# EAGLE board RasPi-BplusHAT_CamSlot (EAGLE 7.4.0)
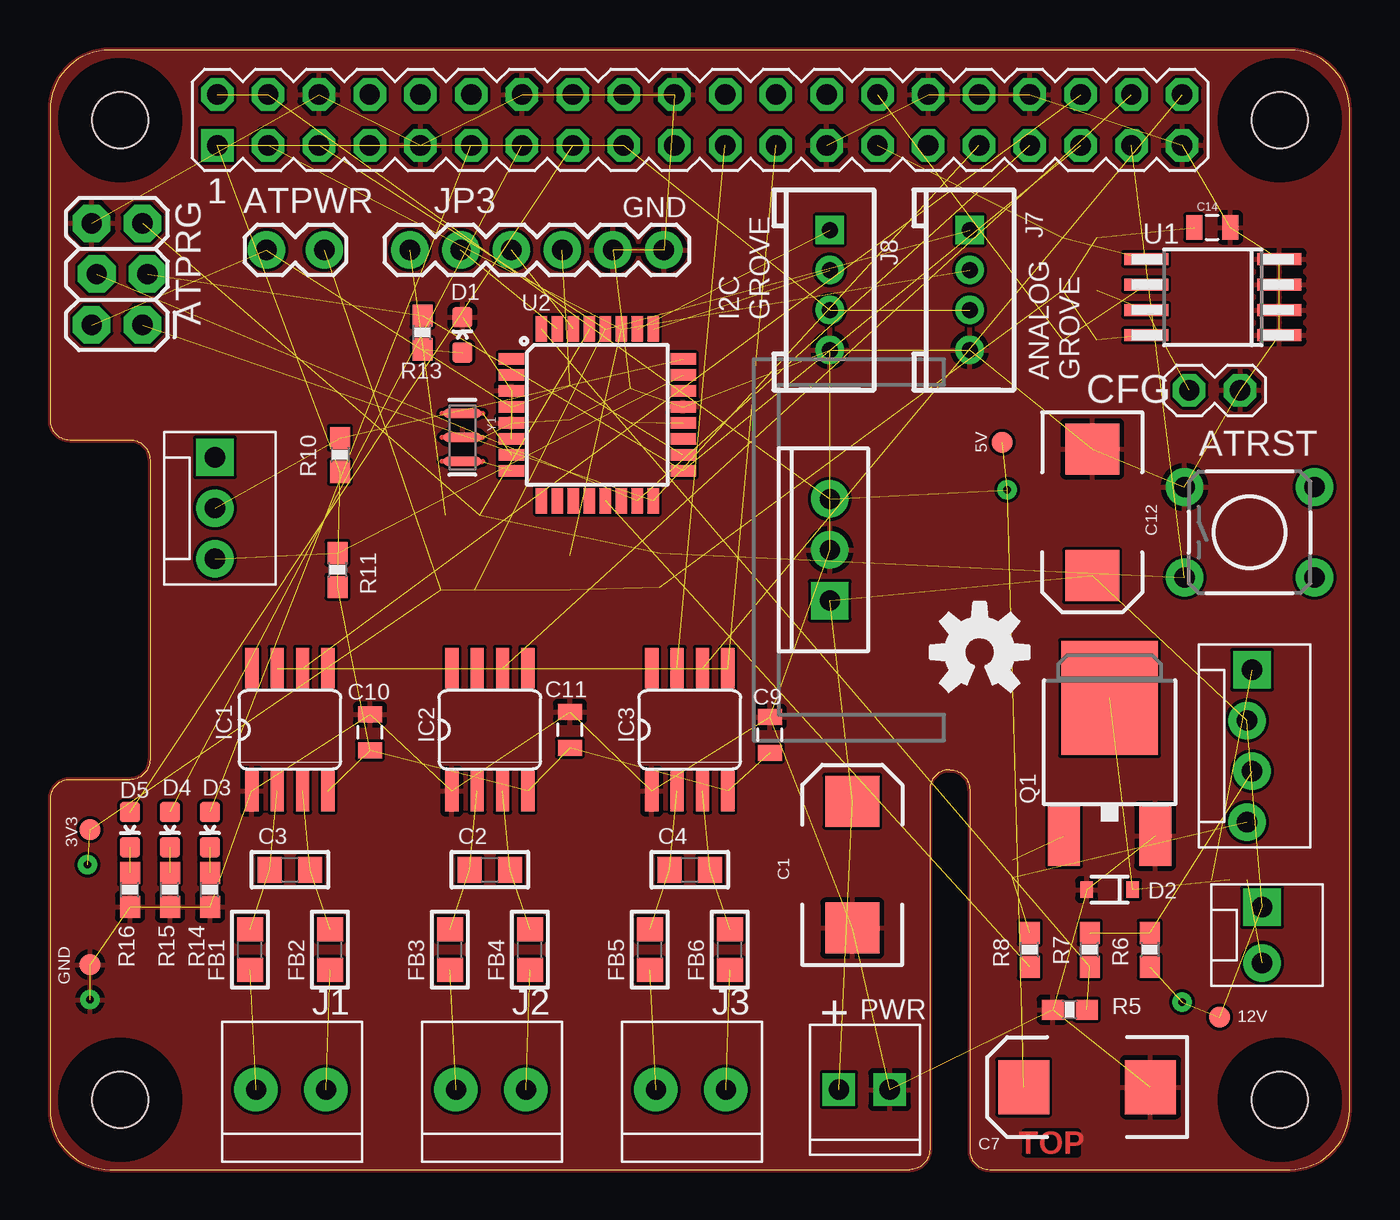
[diagram p0: board, top side]
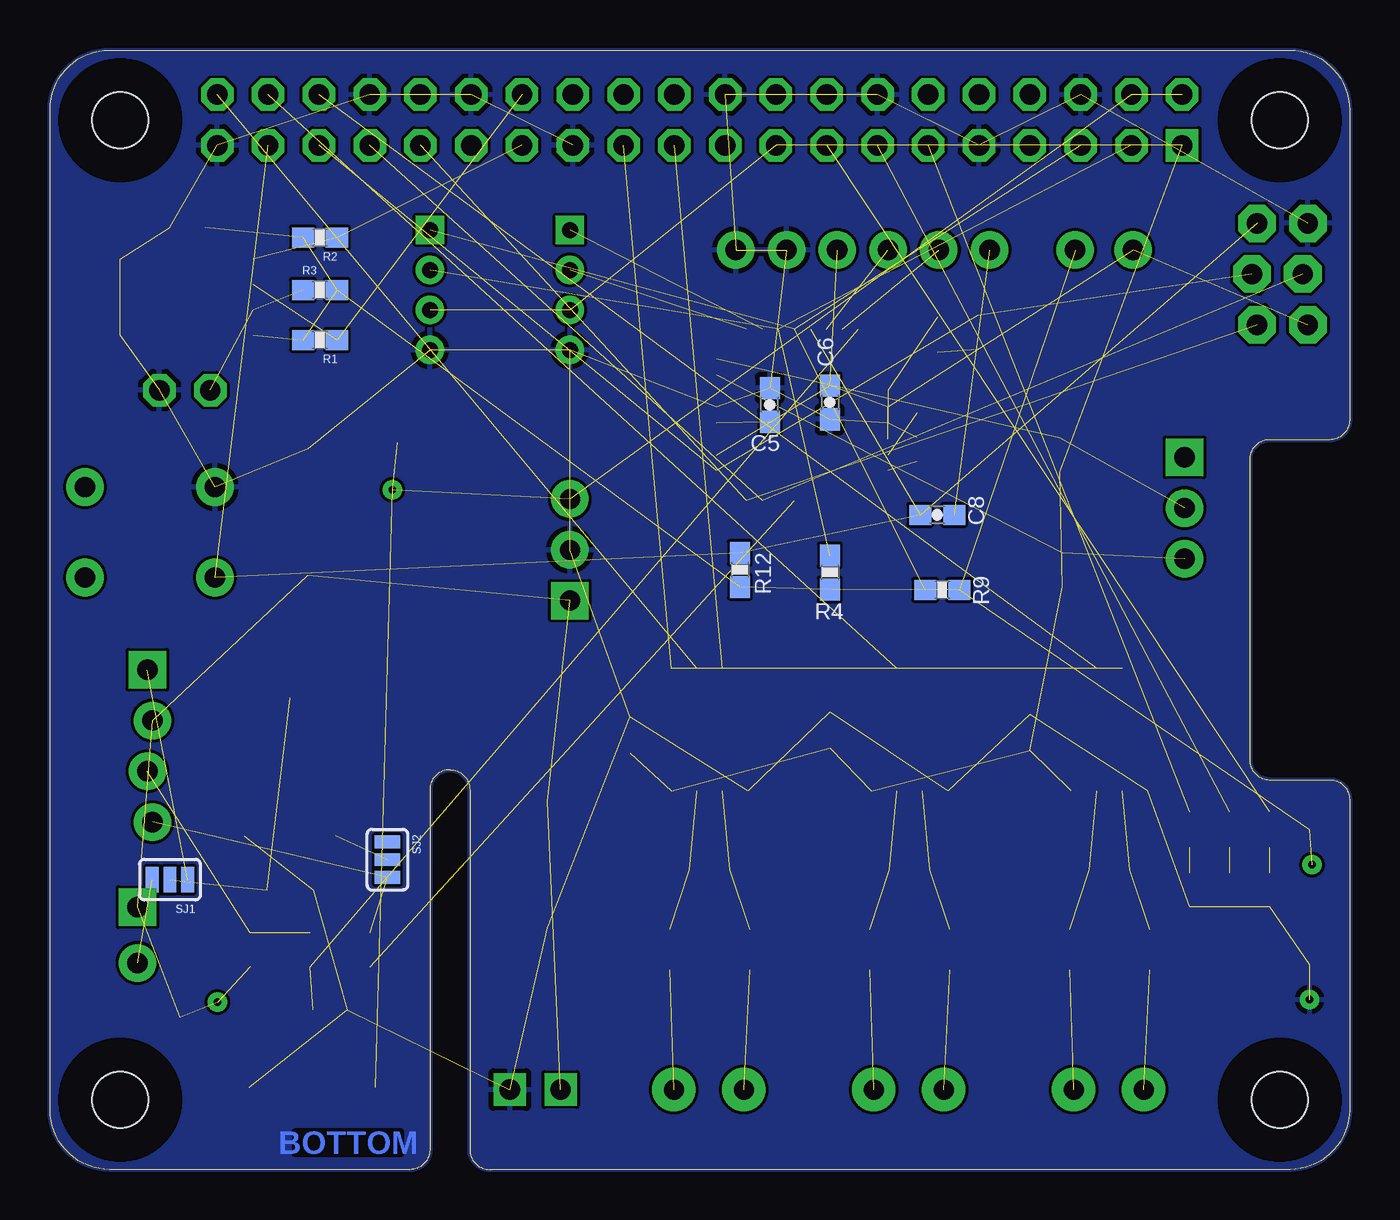
[diagram p1: board, bottom side, seen from below]

Size 65 x 56 mm. Coordinates in mm from the lower left corner, seen from the top.
Outline: 0,3 arc90 3,0 43,0 arc90 44,1 44,19 arc-90 45,20 arc-90 46,19 46,1 arc90 47,0 62,0 arc90 65,3 65,53 arc90 62,56 3,56 arc90 0,53 0,37.5 arc90 1,36.5 4,36.5 arc-90 5,35.5 5,20.5 arc-90 4,19.5 1,19.5 arc90 0,18.5 0,3
Copper layers (1*16): Top 0.035mm / dielectric 1.5mm / Bottom 0.035mm
Design rules "DFRobot_Eagle_Rule_v0.4 *": minimum track width 6mil, minimum drill 12mil, track to track 6mil, track to pad 6mil, pad to pad 6mil, via to via 6mil, smd to smd 0mil, copper to edge 0mil, drill to drill 10mil, minimum pad ring 12mil, minimum via ring 8mil, stop-mask expansion 2mil, vias tented up to drill 25mil, thermal gap 10mil
Net classes: 1 power: width 0.305 mm
Holes 2.8 mm at 3.5,3.5 3.5,52.5 61.5,52.5 61.5,3.5
tRestrict: area 1.9,51 to 5,54; area 60,51 to 63,54; area 60,1.9 to 63,5; area 1.9,1.9 to 5,5
bRestrict: area 1.9,1.9 to 5,5; area 1.9,51 to 5,54; area 60,1.9 to 63,5; area 60,51 to 63,54

## Footprints (pad centres in the part's own frame; a part is rotated, then mirrored left to right if it is on the bottom)
2X3_LOCK = drill 1.016 pad 1.88 octagon: 1 0,0; 2 0,2.54; 3 2.54,-0.254; 4 2.54,2.286; 5 5.08,0; 6 5.08,2.54
1X02_LOCK = drill 1.016 pad 1.88: 1 -0.178,0; 2 2.718,0
TACTILE-PTH = drill 1.016 pad 1.88: 1 -3.251,2.261; 2 3.251,2.261; 3 -3.251,-2.261; 4 3.251,-2.261
EIA7343 = smd 2.55 x 2.7: A 3.17,0; C -3.17,0
_0805 = smd 1.2 x 1.3: 1 -1.016,0; 2 1.016,0
0603-CAP = smd 1.1 x 1: 1 -0.85,0; 2 0.85,0
0805 = smd 0.8 x 1.2: 1 -0.9,0; 2 0.9,0
PIN_W_2 = drill 1.016 octagon: 1 0,0; 2 0,-2.54
LED-0603 = smd 1 x 1: A 0,-0.877; C 0,0.877
SOD-323 = smd 0.63 x 0.83: A 1.15,0; C -1.15,0
SO08 = smd 0.66 x 2.032: 1 -1.905,-3.073; 2 -0.635,-3.073; 3 0.635,-3.073; 4 1.905,-3.073; 5 1.905,3.073; 6 0.635,3.073; 7 -0.635,3.073; 8 -1.905,3.073
1X2-3.5MM = drill 1 pad 2.184: 1 1.8,0; 2 -1.7,0
HW4-2.0 = drill 0.8 pad 1.27 square: 1 -3,0 | drill 0.8 pad 1.27: 2 -1,0; 3 1,0; 4 3,0
MOLEX-1X3 = drill 1.016 pad 1.88 square: 1 0,0 | drill 1.016 pad 1.88: 2 2.54,0; 3 5.08,0
MOLEX-1X2_LOCK = drill 1.016 pad 1.88 square: 1 -0.127,0 | drill 1.016 pad 1.88: 2 2.667,0
FTDI_BASIC = drill 1.016 pad 1.88: CTS 10.16,0; DTR 0,0; GND 12.7,0; RXI 2.54,0; TXO 5.08,0; VCC 7.62,0
1X02_2.54_SCREWTERM = drill 1.016 square: P1 2.54,0; P2 0,0
MOLEX-1X4_LOCK = drill 1.016 pad 1.88 square: 1 0,0.127 | drill 1.016 pad 1.88: 2 2.54,-0.127; 3 5.08,0.127; 4 7.62,-0.127
PIN_20X2 = drill 1.016 square: 1 -24.13,-1.27 | drill 1.016 octagon: 2 -24.13,1.27; 3 -21.59,-1.27; 4 -21.59,1.27; 5 -19.05,-1.27; 6 -19.05,1.27; 7 -16.51,-1.27; 8 -16.51,1.27; 9 -13.97,-1.27; 10 -13.97,1.27; 11 -11.43,-1.27; 12 -11.43,1.27; 13 -8.89,-1.27; 14 -8.89,1.27; 15 -6.35,-1.27; 16 -6.35,1.27; 17 -3.81,-1.27; 18 -3.81,1.27; 19 -1.27,-1.27; 20 -1.27,1.27; 21 1.27,-1.27; 22 1.27,1.27; 23 3.81,-1.27; 24 3.81,1.27; 25 6.35,-1.27; 26 6.35,1.27; 27 8.89,-1.27; 28 8.89,1.27; 29 11.43,-1.27; 30 11.43,1.27; 31 13.97,-1.27; 32 13.97,1.27; 33 16.51,-1.27; 34 16.51,1.27; 35 19.05,-1.27; 36 19.05,1.27; 37 21.59,-1.27; 38 21.59,1.27; 39 24.13,-1.27; 40 24.13,1.27
DPAK = smd 1.6 x 3: 1 -2.28,-5.31; 3 2.28,-5.31 | smd 4.826 x 5.715: 4 0,1.588
0603-RES = smd 1.1 x 1: 1 -0.85,0; 2 0.85,0
SJ_3 = smd 0.635 x 1.27: 1 -0.889,0; 2 0,0; 3 0.889,0
PAD.03X.04 = smd 1.016 x 1.016: P$1 0,0
TP_15TH = drill 0.381 pad 0.61: P$1 0,0
SOIC8 = smd 0.6 x 2.2: 1 -1.905,-3.33; 2 -0.635,-3.33; 3 0.635,-3.33; 4 1.905,-3.33; 5 1.905,3.33; 6 0.635,3.33; 7 -0.635,3.33; 8 -1.905,3.33
TQFP32-08 = smd 1.27 x 0.559: 1 -4.293,2.8; 2 -4.293,2; 3 -4.293,1.2; 4 -4.293,0.4; 5 -4.293,-0.4; 6 -4.293,-1.2; 7 -4.293,-2; 8 -4.293,-2.8; 17 4.293,-2.8; 18 4.293,-2; 19 4.293,-1.2; 20 4.293,-0.4; 21 4.293,0.4; 22 4.293,1.2; 23 4.293,2; 24 4.293,2.8 | smd 0.559 x 1.27: 9 -2.8,-4.293; 10 -2,-4.293; 11 -1.2,-4.293; 12 -0.4,-4.293; 13 0.4,-4.293; 14 1.2,-4.293; 15 2,-4.293; 16 2.8,-4.293; 25 2.8,4.293; 26 2,4.293; 27 1.2,4.293; 28 0.4,4.293; 29 -0.4,4.293; 30 -1.2,4.293; 31 -2,4.293; 32 -2.8,4.293
TO220-IGO = drill 1 pad 1.88: GND 0,0; OUT 2.54,0 | drill 1 pad 1.88 square: IN -2.54,0
RESONATOR-SMD = smd 0.45 x 1.905: 1 -1.2,0; 2 0,0; 3 1.2,0

## Placement (x,y rotation side)
ATPRG  AVR_SPI_PRG_62X3_LOCK  [2X3_LOCK]  4.62,42.25 90 top
ATPWR  [1X02_LOCK]  11,46 0 top
ATRST  SWITCH-MOMENTARY-2PTH  [TACTILE-PTH]  60,31.88 0 top
C1  47uF  [EIA7343]  40.12,15.25 90 top
C2  0.01µF  [_0805]  22,15 0 top
C3  0.01µF  [_0805]  12,15 0 top
C4  0.01µF  [_0805]  32,15 0 top
C5  0.1uF  [0603-CAP]  29,38.25 90 bottom
C6  0.1uF  [0603-CAP]  26,38.38 270 bottom
C7  47uF  [EIA7343]  51.88,4.12 180 top
C8  0.1uF  [0603-CAP]  20.62,32.75 0 bottom
C9  0.1uF  [0805]  36,21.75 90 top
C10  0.1uF  [0805]  16,21.88 90 top
C11  0.1uF  [0805]  26,22 90 top
C12  47uF  [EIA7343]  52.12,32.88 270 top
C14  0.1uF  [0805]  58.12,47.12 0 top
CFG  [PIN_W_2]  56.98,38.98 90 top
D1  [LED-0603]  20.62,41.75 0 top
D2  250mA  [SOD-323]  53,14 180 top
D3  [LED-0603]  8,17 180 top
D4  [LED-0603]  6,17 180 top
D5  [LED-0603]  4,17 180 top
FB1  Ferrite  [_0805]  10,11 90 top
FB2  Ferrite  [_0805]  14,11 90 top
FB3  Ferrite  [_0805]  20,11 90 top
FB4  Ferrite  [_0805]  24,11 90 top
FB5  Ferrite  [_0805]  30,11 90 top
FB6  Ferrite  [_0805]  34,11 90 top
IC1  MAX31855  [SO08]  12,22 0 top
IC2  MAX31855  [SO08]  22,22 0 top
IC3  MAX31855  [SO08]  32,22 0 top
J1  1X2-3.5MM  [1X2-3.5MM]  12,4 0 top
J2  1X2-3.5MM  [1X2-3.5MM]  22,4 0 top
J3  1X2-3.5MM  [1X2-3.5MM]  32,4 0 top
J7  4P-2.0  [HW4-2.0]  46,44 270 top
J8  4P-2.0  [HW4-2.0]  39,44 270 top
JP1  [MOLEX-1X3]  8.25,35.62 270 top
JP2  [MOLEX-1X2_LOCK]  60.62,13 270 top
JP3  FTDI  [FTDI_BASIC]  18,46 0 top
JP4  [1X02_2.54_SCREWTERM]  42,4 180 top
JP10  [MOLEX-1X4_LOCK]  60,25 270 top
K1  PIN20X2  [PIN_20X2]  32.5,52.5 0 top
LOGO1  OSHW-LOGOM  [OSHW-LOGO-M]  46.5,25.88 0 top
Q1  NFET-FDD8780  [DPAK]  53,22 0 top
R1  10K  [0603-RES]  51.5,41.5 180 bottom
R2  10K  [0603-RES]  51.5,46.62 180 bottom
R3  10K  [0603-RES]  51.5,44 0 bottom
R4  10K  [0603-RES]  26,29.88 270 bottom
R5  4.7K  [0603-RES]  51,8 0 top
R6  10K  [0603-RES]  55,11 270 top
R7  10K  [0603-RES]  52,11 90 top
R8  330  [0603-RES]  49,11 90 top
R9  10K  [0603-RES]  20.38,29 0 bottom
R10  100K  [0603-RES]  14.5,35.75 270 top
R11  100K  [0603-RES]  14.38,30 270 top
R12  10K  [0603-RES]  30.5,30 270 bottom
R13  330  [0603-RES]  18.62,41.88 90 top
R14  330  [0603-RES]  8,14 90 top
R15  330  [0603-RES]  6,14 90 top
R16  330  [0603-RES]  4,14 90 top
SJ1  [SJ_3]  59,14.5 180 bottom
SJ2  [SJ_3]  48.12,15.5 270 bottom
TP1  3V3  [PAD.03X.04]  2,17 0 top
TP2  12V  [PAD.03X.04]  58.5,7.62 0 top
TP3  5V  [PAD.03X.04]  47.62,36.38 0 top
TP4  3V3  [TP_15TH]  1.88,15.25 0 top
TP5  3V3  [TP_15TH]  56.62,8.38 0 top
TP6  3V3  [TP_15TH]  47.88,34 0 top
TP7  GND  [PAD.03X.04]  2,10.25 0 top
TP8  3V3  [TP_15TH]  2,8.5 0 top
U1  EEPROM24  [SOIC8]  58.16,43.63 90 top
U2  ATMEGA328P  [TQFP32-08]  27.38,37.75 0 top
U3  [TO220-IGO]  39,31 90 top
Y1  8MHZ  [RESONATOR-SMD]  20.62,36.62 270 top

## Library data of the parts
ATPRG ATPWR JP1-JP4 JP10 = SparkFun-Connectors
ATRST = SparkFun-Electromechanical; PROD_ID: SWCH-08441
C1 C7 C12 = SparkFun-Capacitors; PROD_ID: CAP-08702
C2-C4 FB1-FB6 = microbuilder
C5 C6 C8 = SparkFun-Capacitors; PROD_ID: CAP-00810
C9-C11 C14 TP1-TP8 = SparkFun-Passives
CFG K1 U1 = FLYFISH
D1 D3-D5 = SparkFun-LED
D2 = SparkFun-DiscreteSemi; PROD_ID: DIO-09646
IC1-IC3 J1-J3 = adafruit
J7 J8 = Seeed-OPL-Connector
LOGO1 = SparkFun-Aesthetics
Q1 = SparkFun-DiscreteSemi; PROD_ID: TRANS-09984
R1-R4 R6 R7 R9-R12 = SparkFun-Resistors; PROD_ID: RES-00824
R5 = SparkFun-Resistors; PROD_ID: RES-07857
R8 R13-R16 = SparkFun-Resistors
SJ1 SJ2 = SparkFun-Retired
U2 = SparkFun-DigitalIC; PROD_ID: IC-09069
U3 = SparkFun-PowerIC
Y1 = SparkFun-FreqCtrl; PROD_ID: XTAL-08895

## Nets
3.3V [power]: C9.1 C10.1 C11.1 IC1.4 IC2.4 IC3.4 J7.3 J8.3 K1.1 K1.17 R10.2 R11.2
12V [power]: C1.A C12.A JP2.1 JP4.P1 JP10.2 R6.2 TP2.P$1 TP5.P$1 U3.IN
+3V3 [power]: ATPWR.2 C14.1 R1.2 R2.2 R3.2 R4.2 R9.2 R12.2 TP1.P$1 TP4.P$1 U1.8
+5V [power]: C7.A K1.2 K1.4 TP3.P$1 TP6.P$1 U3.OUT
ADC0: JP1.3 R11.1 U2.23
ADC1: JP1.2 R10.1 U2.24
ADC2: J8.2 U2.25
ADC3: J8.1 U2.26
AT5 [power]: ATPRG.2 ATPWR.1 C6.1 JP3.VCC U2.4 U2.6 U2.18
ATMISO: ATPRG.1 K1.31 U2.16
ATMOSI: ATPRG.4 K1.33 U2.15
ATRST: ATPRG.5 ATRST.3 C8.1 K1.37 R12.1 U2.29
ATSCK: ATPRG.3 K1.35 R13.2 U2.17
CS0: IC1.6 K1.36
CS1: IC2.6 K1.38
CS2: IC3.6 K1.40
GND [power]: ATPRG.6 ATRST.1 C1.C C5.2 C6.2 C7.C C9.2 C10.2 C11.2 C12.C C14.2 CFG.2 D1.C D2.A IC1.1 IC2.1 IC3.1 J7.4 J8.4 JP3.CTS JP3.GND JP4.P2 K1.6 K1.9 K1.14 K1.20 K1.25 K1.30 K1.34 K1.39 Q1.3 R5.1 R14.1 R15.1 R16.1 TP7.P$1 TP8.P$1 U1.1 U1.2 U1.3 U1.4 U2.3 U2.5 U2.21 U3.GND Y1.2
LED1: D3.A K1.11
LED2: D4.A K1.13
LED3: D5.A K1.15
MISO: IC1.7 IC2.7 IC3.7 K1.21
MOSI: K1.19
N$1: K1.28 R1.1 U1.6
N$2: K1.27 R2.1 U1.5
N$3: CFG.1 R3.1 U1.7
N$4: FB1.1 J1.2
N$5: C3.1 FB1.2 IC1.2
N$6: FB2.1 J1.1
N$7: C3.2 FB2.2 IC1.3
N$8: FB3.1 J2.2
N$9: C2.1 FB3.2 IC2.2
N$10: FB4.1 J2.1
N$11: C2.2 FB4.2 IC2.3
N$12: FB5.1 J3.2
N$13: C4.1 FB5.2 IC3.2
N$14: FB6.1 J3.1
N$15: C4.2 FB6.2 IC3.3
N$16 [power]: JP2.2 SJ1.3
N$17 [power]: JP10.1 SJ1.1
N$18: C5.1 U2.20
N$19: C8.2 JP3.DTR
N$20: D1.A R13.1
N$21: D3.C R14.2
N$22 [power]: D2.C Q1.4 SJ1.2
N$23: D4.C R15.2
N$24: D5.C R16.2
N$25: Q1.1 SJ2.2
N$26: U2.7 Y1.1
N$27: U2.8 Y1.3
N$28: JP1.1
PB1: R8.1 U2.13
PD5: SJ2.1
PWM: JP10.4 R8.2 SJ2.3
RX: JP3.TXO U2.30
SCL: J7.1 K1.5 R9.1 U2.28
SCLK: IC1.5 IC2.5 IC3.5 K1.23
SDA: J7.2 K1.3 R4.1 U2.27
SENSE: R5.2 R7.1 U2.32
TACH: JP10.3 R6.1 R7.2
TX: JP3.RXI U2.31

## Tracks (layer width: path | path; a pad name or v marks a point on that pad's centre or on a via)
3.3V  (11 unrouted)
12V  (8 unrouted)
+3V3  (10 unrouted)
+5V  (5 unrouted)
ADC0  (2 unrouted)
ADC1  (2 unrouted)
ADC2  (1 unrouted)
ADC3  (1 unrouted)
AT5  (6 unrouted)
ATMISO  (2 unrouted)
ATMOSI  (2 unrouted)
ATRST  (5 unrouted)
ATSCK  (3 unrouted)
CS0  (1 unrouted)
CS1  (1 unrouted)
CS2  (1 unrouted)
GND  (45 unrouted)
  pour Bottom: 0,3 arc90 3,0 43,0 arc90 44,1 44,19 arc-90 45,20 arc-90 46,19 46,1 arc90 47,0 62,0 arc90 65,3 65,53 arc90 62,56 3,56 arc90 0,53 0,37.5 arc90 1,36.5 4,36.5 arc-90 5,35.5 5,20.5 arc-90 4,19.5 1,19.5 arc90 0,18.5
  pour Top: 0,3 arc90 3,0 43,0 arc90 44,1 44,19 arc-90 45,20 arc-90 46,19 46,1 arc90 47,0 62,0 arc90 65,3 65,53 arc90 62,56 3,56 arc90 0,53 0,37.5 arc90 1,36.5 4,36.5 arc-90 5,35.5 5,20.5 arc-90 4,19.5 1,19.5 arc90 0,18.5
LED1  (1 unrouted)
LED2  (1 unrouted)
LED3  (1 unrouted)
MISO  (3 unrouted)
N$1  (2 unrouted)
N$2  (2 unrouted)
N$3  (2 unrouted)
N$4  (1 unrouted)
N$5  (2 unrouted)
N$6  (1 unrouted)
N$7  (2 unrouted)
N$8  (1 unrouted)
N$9  (2 unrouted)
N$10  (1 unrouted)
N$11  (2 unrouted)
N$12  (1 unrouted)
N$13  (2 unrouted)
N$14  (1 unrouted)
N$15  (2 unrouted)
N$16  (1 unrouted)
N$17  (1 unrouted)
N$18  (1 unrouted)
N$19  (1 unrouted)
N$20  (1 unrouted)
N$21  (1 unrouted)
N$22  (2 unrouted)
N$23  (1 unrouted)
N$24  (1 unrouted)
N$25  (1 unrouted)
N$26  (1 unrouted)
N$27  (1 unrouted)
PB1  (1 unrouted)
PWM  (2 unrouted)
RX  (1 unrouted)
SCL  (3 unrouted)
SCLK  (3 unrouted)
SDA  (3 unrouted)
SENSE  (2 unrouted)
TACH  (2 unrouted)
TX  (1 unrouted)

## Text on the board
Top: TOP
Bottom: BOTTOM
tNames: GND | I2C / GROVE | ANALOG / GROVE | 5V | 3V3 | GND | PWR | + | 12V